# EAGLE board 1-10-2 (EAGLE 9.6.2)

Size 129.21 x 71.11 mm. Coordinates in mm from the lower left corner, seen from the top.
Outline: 0,0 129.21,0 129.21,71.11 0,71.11 0,0
Copper layers (1*16): Top 0.035mm / dielectric 1.5mm / Bottom 0.035mm
Design rules "default": minimum track width 6mil, minimum drill 0.35mm, track to track 6mil, track to pad 6mil, pad to pad 6mil, via to via 6mil, smd to smd 6mil, copper to edge 40mil, drill to drill 6mil, minimum pad ring 10mil, minimum via ring 8mil, stop-mask expansion 4mil, vias tented up to drill 0mil, thermal gap 10mil
Holes 5.08 mm at 125.73,6.35 3.81,6.35 3.81,67.31 125.73,67.31

## Footprints (pad centres in the part's own frame; a part is rotated, then mirrored left to right if it is on the bottom)
DCDC = drill 0.6 long: P$1 -17.78,0; P$2 0,0; P$3 0,-39.37; P$4 -17.78,-39.37
FEATHER = drill 0.6 long: P$1 0,-5.08; P$2 0,-7.62; P$3 0,-10.16; P$4 0,-12.7; P$5 0,-15.24; P$6 0,-17.78; P$7 0,-20.32; P$8 0,-22.86; P$9 0,-25.4; P$10 0,-27.94; P$11 0,-30.48; P$12 0,-33.02; P$13 20.32,-5.08; P$14 20.32,-7.62; P$15 20.32,-10.16; P$16 20.32,-12.7; P$17 20.32,-15.24; P$18 20.32,-17.78; P$19 20.32,-20.32; P$20 20.32,-22.86; P$21 20.32,-25.4; P$22 20.32,-27.94; P$23 20.32,-30.48; P$24 20.32,-33.02; P$25 20.32,-35.56; P$26 20.32,-38.1; P$27 20.32,-40.64; P$28 20.32,-43.18
K96SENSOR = drill 0.6 long: P$1 -17.78,-5.08; P$2 -17.78,-7.62; P$3 -17.78,-10.16; P$4 -17.78,-12.7; P$5 -17.78,-15.24; P$6 12.7,-5.08; P$7 12.7,-7.62; P$8 12.7,-10.16; P$9 12.7,-12.7
PIN = drill 0.6 long: P$1 0,-7.62; P$2 0,-5.08; P$3 0,-2.54; P$4 0,0; P$5 0,2.54
POWERIN = drill 2.54 pad 3.81: P$1 4.445,-13.97; P$2 4.445,-7.62; P$3 0,-10.795
RASPBERRYPI = drill 0.6 long: P$1 10.16,-5.08; P$2 12.7,-5.08; P$3 15.24,-5.08; P$4 17.78,-5.08; P$5 20.32,-5.08; P$6 22.86,-5.08; P$7 25.4,-5.08; P$8 27.94,-5.08; P$9 30.48,-5.08; P$10 33.02,-5.08; P$11 35.56,-5.08; P$12 38.1,-5.08; P$13 40.64,-5.08; P$14 43.18,-5.08; P$15 45.72,-5.08; P$16 48.26,-5.08; P$17 50.8,-5.08; P$18 53.34,-5.08; P$19 55.88,-5.08; P$20 58.42,-5.08; P$21 10.16,-7.62; P$22 12.7,-7.62; P$23 15.24,-7.62; P$24 17.78,-7.62; P$25 20.32,-7.62; P$26 22.86,-7.62; P$27 25.4,-7.62; P$28 27.94,-7.62; P$29 30.48,-7.62; P$30 33.02,-7.62; P$31 35.56,-7.62; P$32 38.1,-7.62; P$33 40.64,-7.62; P$34 43.18,-7.62; P$35 45.72,-7.62; P$36 48.26,-7.62; P$37 50.8,-7.62; P$38 53.34,-7.62; P$39 55.88,-7.62; P$40 58.42,-7.62

## Placement (x,y rotation side)
DCDC1  DCDC  [DCDC]  58.42,27.94 90 top
FEATHER1  FEATHER  [FEATHER]  102.87,62.23 0 top
K96SENSOR1  K96SENSOR  [K96SENSOR]  73.66,59.69 0 top
PIN1  PIN  [PIN]  46.99,39.37 0 top
PIN2  PIN  [PIN]  46.99,59.69 0 top
U$1  POWER  [POWERIN]  52.07,11.43 180 top
U$2  RASPBERRYPI  [RASPBERRYPI]  41.91,69.85 270 top

## Library data of the parts
DCDC1 FEATHER1 K96SENSOR1 PIN1 PIN2 U$1 U$2 = untitled

## Nets
N$1: DCDC1.P$2 K96SENSOR1.P$2 PIN1.P$1 U$1.P$1
N$2: DCDC1.P$1 DCDC1.P$4 FEATHER1.P$13 K96SENSOR1.P$1 PIN1.P$2 U$1.P$2 U$1.P$3
N$3: FEATHER1.P$6 K96SENSOR1.P$4
N$4: DCDC1.P$3 FEATHER1.P$12
N$5: FEATHER1.P$7 K96SENSOR1.P$5
N$6: FEATHER1.P$4 K96SENSOR1.P$8
N$7: FEATHER1.P$9 PIN2.P$1
N$8: FEATHER1.P$3 K96SENSOR1.P$6
N$9: FEATHER1.P$27 K96SENSOR1.P$3
N$10: FEATHER1.P$8 PIN2.P$2

## Tracks (layer width: path | path; a pad name or v marks a point on that pad's centre or on a via)
N$1  (3 unrouted)
N$2  (6 unrouted)
N$3  (1 unrouted)
N$4  (1 unrouted)
N$5  (1 unrouted)
N$6  (1 unrouted)
N$7  (1 unrouted)
N$8  (1 unrouted)
N$9  (1 unrouted)
N$10  (1 unrouted)

## Text on the board
tValues: D12 | D13